# Altium PCB analog_osc.PcbDoc (part 2 of 2)
Units mm, origin at the board's own origin, x right, y up, seen from the top; angles counter-clockwise.
Board outline 145 x 85 mm, 4 copper layers (Top Layer, GND, Mid-Layer 1, Bottom Layer); 292 components, 196 nets, 993 pads, 506 vias.
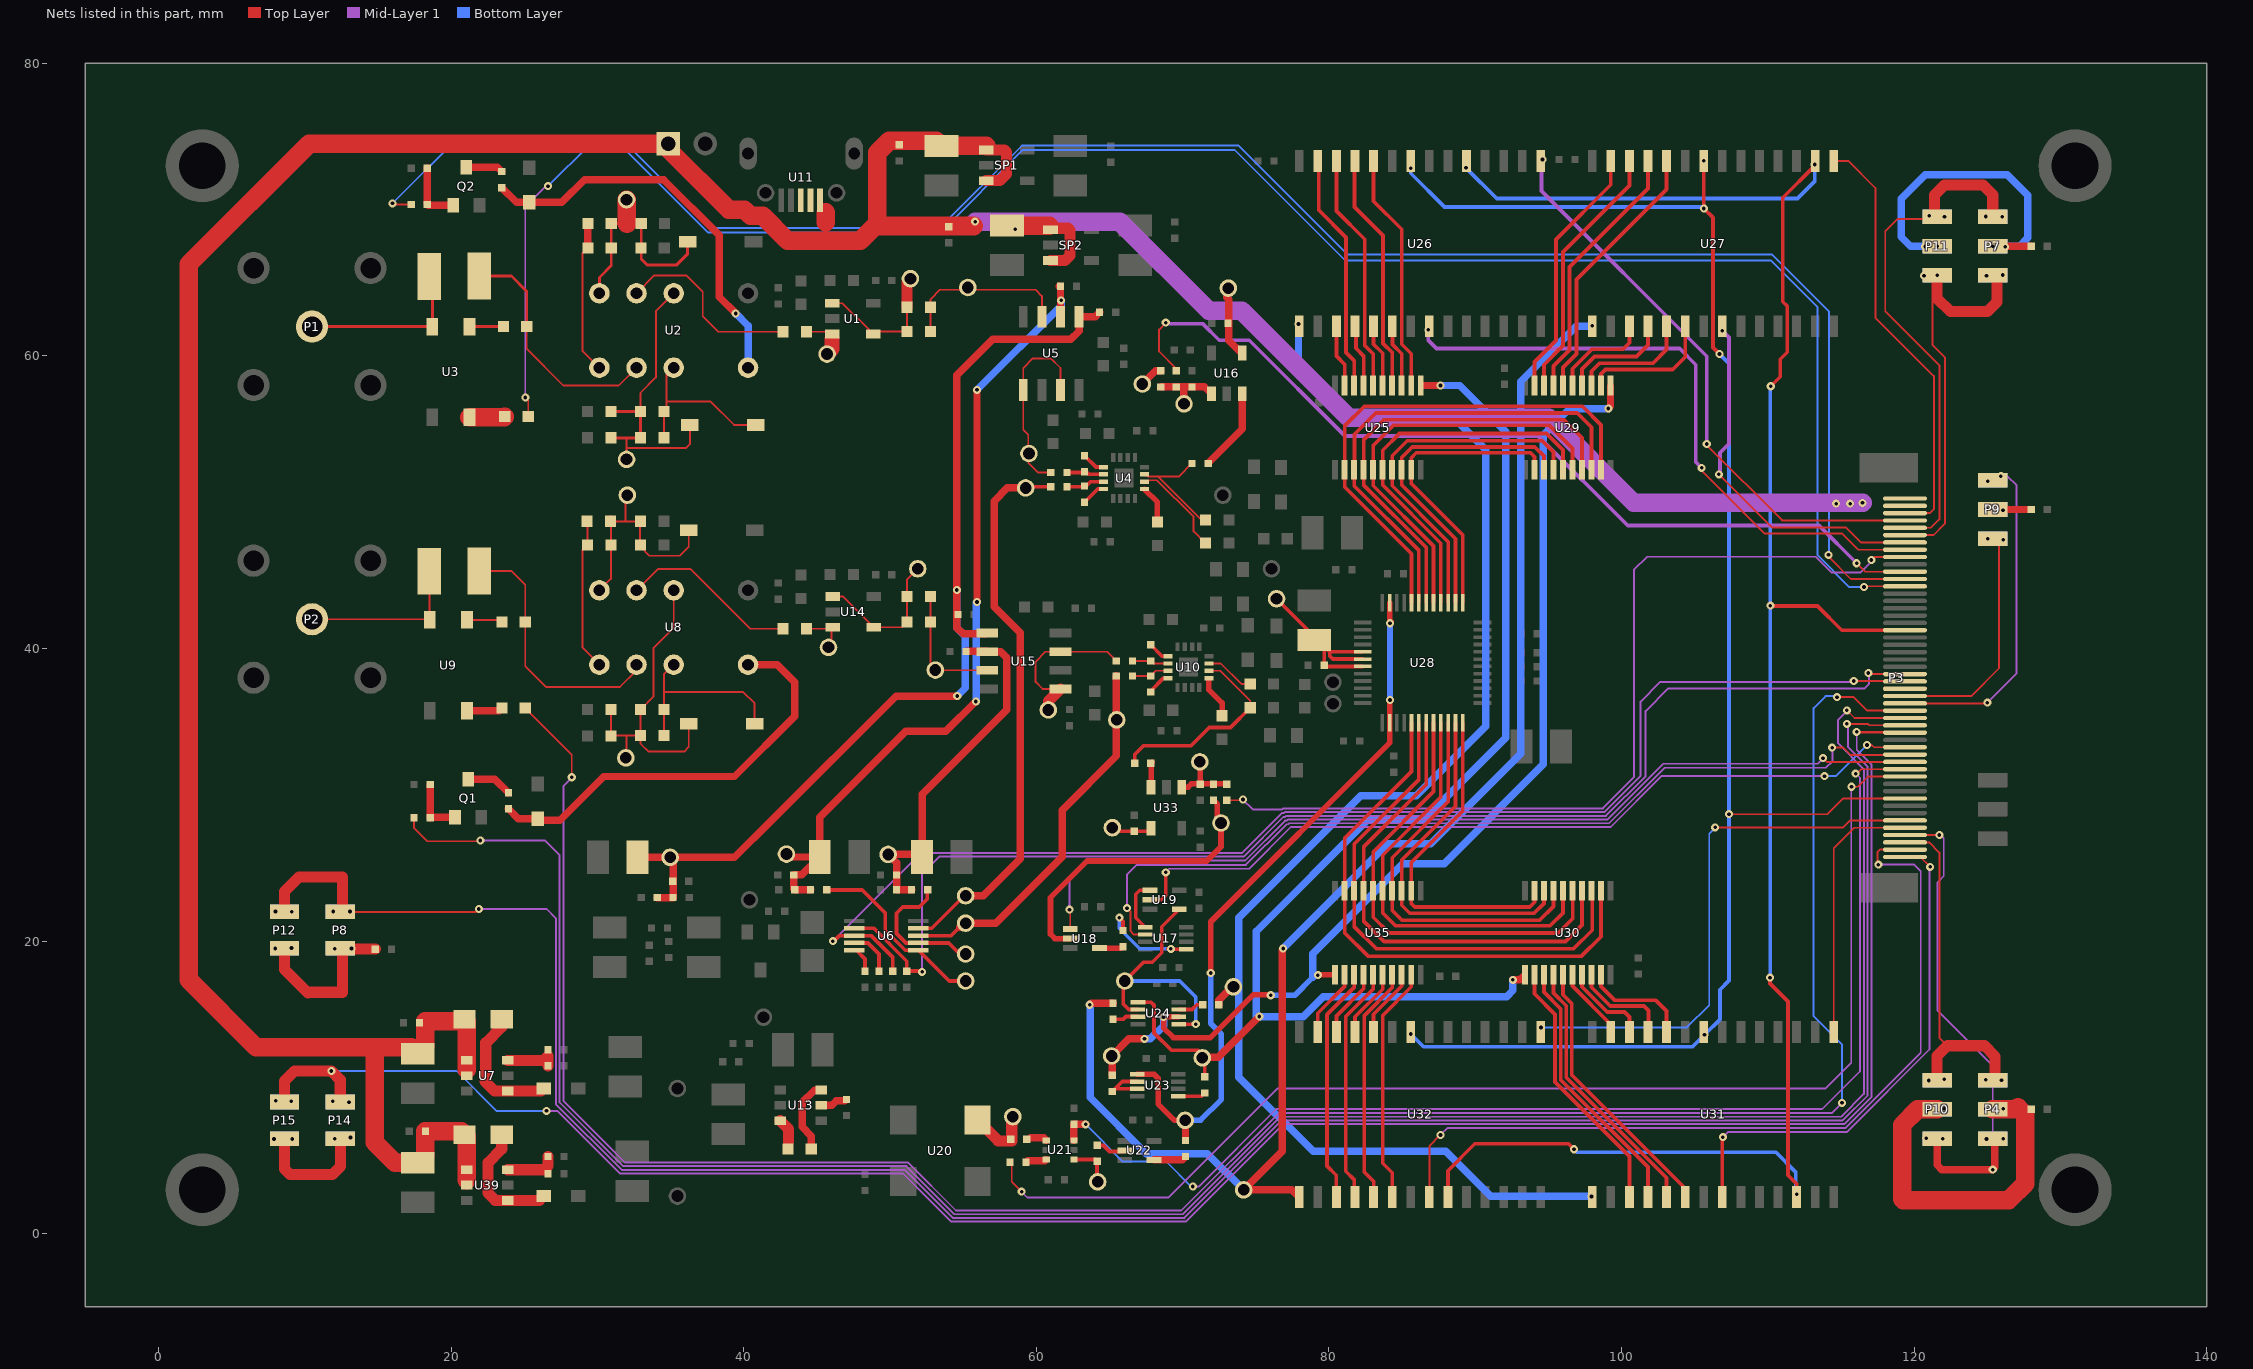
[diagram p4: the nets of this part, all layers, seen from the top]

## Via types
v1: diameter 0.55, hole 0.25, Top Layer to Bottom Layer, tented both sides, 501 vias
v2: diameter 0.55, hole 0.25, Top Layer to Bottom Layer, 5 vias

## Nets (pads, with @x,y where several pads share a name; then routed paths per layer and width w, separated by ;. In a path a pad name is that pad's centre, name@x,y a point inside that pad or via, vN(x,y) a via of type N, cw(c..) or ccw(c..) an arc to the next point about the centre after c; other vN are vias at no path point) (continued)
DQA8: P3.32 U26.19 U27.16 U31.12 U32.9 | length 137.7
  Top Layer w0.254: U32.9@88.135,2.5 88.135,4.31 89.975,6.15 96.375,6.15 v1(96.75,5.775) ; v1(110.15,17.5) 110.15,17.1 111.375,15.875 111.375,4 111.975,3.4 v1(111.975,2.7) ; v1(110.175,42.925) 110.15,42.95 110.125,42.95 110.175,42.9 113.4,42.9 115.05,41.25 P3.32@119.375,41.25 ; v1(110.2,57.925) 110.85,58.575 110.85,59.775 111.325,60.25 111.325,63.4 111.025,63.7 111.025,70.8 113.2,72.975 v1(113.2,73.075)
  Bottom Layer w0.254: v1(89.375,72.85) 91.475,70.75 112.025,70.75 113.2,71.925 v1(113.2,73.075) ; v1(96.75,5.775) 96.95,5.575 110.55,5.575 111.9,4.225 111.9,2.825 111.975,2.75 v1(111.975,2.7) ; v1(110.15,17.5) 110.175,17.525 v1(110.175,42.925) 110.175,57.9 v1(110.2,57.925)
NetC2_1: C2.1 C3.2 R2.1 U2.7 | length 12
  Top Layer w0.127: R2.1@34.55,54.4 C2.1@34.55,56.2 34.725,56.375 34.725,56.87 ; U2.7@35.22,59.195 34.725,58.7 34.725,56.87 ; C3.2@40.825,55.275 39.35,55.275 37.755,56.87 34.725,56.87
  Top Layer w0.2: U2.7@35.22,59.195 U2.7@35.43,59.195
NetC2_2: C2.2 C3.1 C6.1 R2.2 R3.1 T6.1 U2.2 | length 22.1
  Top Layer w0.127: T6.1@32,52.925 32,53.7 ; 32,54.375 32,53.7 ; C2.2@32.95,56.2 32.95,57.475 34,58.525 34,63.055 U2.2@35.22,64.275 ; C3.1@36.325,55.275 36.325,53.975 36.05,53.7 32,53.7
  Top Layer w0.2: R3.1@30.925,54.4 R2.2@32.95,54.4 C2.2@32.95,56.2 C6.1@30.925,56.2
NetC5_1: C5.1 P1.1 U3.4 | length 11.7
  Top Layer w0.2: P1.1@10.5,62 U3.4@18.725,62 18.725,65.225 C5.1@18.525,65.425
NetC5_2: C5.2 R37.2 U2.6 | length 16.7
  Top Layer w0.127: R37.2@25.175,62 25.175,60.475 27.675,57.975 31.46,57.975 U2.6@32.68,59.195
  Top Layer w0.2: C5.2@21.925,65.45 24.125,65.45 25.175,64.4 R37.2@25.175,62
NetC7_1: C7.1 C12.2 C16.2 R1.2 R9.1 T5.1 U2.4 | length 15.7
  Top Layer w0.2: U2.4@30.14,64.275 30.14,65.365 30.95,66.175 R1.2@30.95,67.375 C16.2@30.95,69.05 32.025,69.05 C7.1@33,69.05 33,66.625 33.425,66.2 35.4,66.2 36.175,66.975 C12.2@36.175,67.8
  Top Layer w1.27: T5.1@32,70.675 32,69.075 32.025,69.05
NetC16_1: C16.1 R1.1 U2.5 | length 10.5
  Top Layer w0.127: R1.1@29.35,67.375 28.975,67 28.975,60.36 U2.5@30.14,59.195
  Top Layer w0.508: R1.1@29.35,67.375 C16.1@29.35,69.05
NetC17_1: C17.1 R4.1 T2.1 U1.1 U1.4 | length 9.6
  Top Layer w0.127: U1.1@46.05,63.6 46.75,63.6 48.675,61.675 R4.1@51.175,61.675 C17.1@51.175,63.325
  Top Layer w0.762: C17.1@51.175,63.325 51.175,65.05 T2.1@51.4,65.275
NetC17_2: C17.2 R4.2 T3.1 U5.3 | length 11.7
  Top Layer w0.127: R4.2@52.775,61.675 C17.2@52.775,63.325 52.775,63.875 53.416,64.516 59.959,64.516 60.385,64.09 U5.3@60.385,62.675
NetC23_1: C23.1 P2.1 U9.4 | length 11.3
  Top Layer w0.127: P2.1@10.5,42 18.5,42 18.525,42.025 C23.1@18.525,45.275
NetC23_2: C23.2 R15.2 U8.6 | length 18.2
  Top Layer w0.127: C23.2@21.925,45.3 24.125,45.3 25.075,44.35 R15.2@25.075,41.8 25.075,38.775 26.475,37.375 31.55,37.375 32.68,38.505 U8.6@32.68,38.895
NetC24_1: C24.1 C26.2 R18.1 U8.7 | length 13
  Top Layer w0.127: R18.1@34.55,34.05 C24.1@34.55,35.825 34.55,37.025 ; U8.7@35.22,38.895 34.55,38.225 34.55,37.025 ; C26.2@40.75,34.85 40.75,36.25 39.975,37.025 34.55,37.025
NetC24_2: C24.2 C26.1 C39.1 R18.2 R23.1 T8.1 U8.2 | length 21.9
  Top Layer w0.127: C39.1@30.925,35.825 30.925,34.15 31.025,34.05 31.988,34.05 ; T8.1@31.85,32.625 31.988,32.762 31.988,34.05 ; U8.2@35.22,43.975 35.22,41.42 33.85,40.05 33.85,36.725 C24.2@32.95,35.825 R18.2@32.95,34.05 ; C26.1@36.25,34.85 36.25,33.275 35.925,32.95 33.5,32.95 32.95,33.5 R18.2@32.95,34.05 ; 31.988,34.05 R18.2@32.95,34.05
NetC27_1: C27.1 R20.1 U8.5 | length 10.4
  Top Layer w0.127: C27.1@29.325,48.675 R20.1@29.325,47.075 28.975,46.725 28.975,40.1 30.14,38.935 U8.5@30.14,38.895
NetC27_2: C27.2 C40.2 C41.1 R20.2 R27.1 T9.1 U8.4 | length 15.5
  Top Layer w0.127: U8.4@30.14,43.975 30.925,44.76 30.925,45.725 R20.2@30.925,47.075 30.925,48.675 31.925,48.675 ; T9.1@31.925,50.35 31.925,48.675 ; R27.1@32.925,47.1 32.925,48.675 31.925,48.675 ; R27.1@32.95,47.075 32.95,46.95 33.562,46.338 35.638,46.338 36.25,46.95 C40.2@36.25,48.075
  Top Layer w0.762: C27.2@30.9,48.7 C27.2@30.925,48.675 ; T9.1@31.95,50.375 T9.1@32.05,50.475
NetC42_1: C42.1 R24.1 T11.1 U14.1 U14.4 | length 10
  Top Layer w0.127: U14.1@46.1,43.55 46.8,43.55 U14.4@48.9,41.45 50.825,41.45 R24.1@51.175,41.8 C42.1@51.175,43.55 51.175,44.725 T11.1@51.9,45.45
NetC42_2: C42.2 R24.2 T12.1 U15.3 | length 8.8
  Top Layer w0.127: C42.2@52.775,43.55 R24.2@52.775,41.8 52.775,38.65 52.915,38.51 U15.3@56.65,38.51
NetC51_1: C51.1 U13.6 | length 5.1
  Top Layer w0.508: C51.1@44.625,5.8 44.625,6.675 44,7.3 44,8.975 44.85,9.825 U13.6@45.3,9.825
NetC51_2: C51.2 U13.3 | length 1.7
  Top Layer w0.762: U13.3@42.5,7.725 43.075,7.15 43.075,6.275
NetC85_1: C85.1 C107.1 T43.1 U28.5 U28.6 U28.7 | length 14
  Top Layer w0.254: T43.1@76.425,43.4 79.275,40.55 C85.1@79.675,40.15 ; U28.7@82.3,38.775 79.75,38.775 C107.1@79.675,38.85 C85.1@79.675,40.15 ; U28.6@82.3,39.275 80.275,39.275 80.062,39.488 80.062,39.763 80.05,39.775 ; U28.5@82.3,39.775 80.05,39.775 ; C85.1@79.675,40.15 80.05,39.775
NetD1_1: D1.1 L1.2 U7.1 | length 9.1
  Top Layer w0.762: L1.2@23.465,14.65 23.465,14.14 22.375,13.05 22.375,10.45 22.325,10.4 22.975,9.75 U7.1@23.875,9.75 26.15,9.75 D1.1@26.325,9.925
NetD5_1: D5.1 L2.2 U39.1 | length 8.5
  Top Layer w0.762: L2.2@23.465,6.775 23.465,5.79 22.525,4.85 22.525,2.775 23.025,2.275 U39.1@23.875,2.275 26.025,2.275 D5.1@26.325,2.575
NetP3_1: P3.1 U31.8 | length 35.2
  Top Layer w0.127: P3.1@119.375,25.75 120.425,25.75 v1(121.1,25.075)
  Top Layer w0.254: U31.8@106.89,2.5 106.89,6.565 v1(106.925,6.6)
  Mid-Layer 1 w0.127: v1(106.925,6.6) 107.275,6.95 115.4,6.95 121.05,12.6 121.05,25.025 v1(121.1,25.075)
NetP3_2: P3.2 U32.8 | length 58
  Top Layer w0.127: U32.8@86.865,2.5 86.865,5.99 v1(87.625,6.75) ; v1(117.55,25.225) 117.5,25.275 117.5,26.1 117.65,26.25 P3.2@119.375,26.25
  Mid-Layer 1 w0.127: v1(87.625,6.75) 88.109,7.234 115.325,7.234 120.45,12.359 120.45,24.775 120,25.225 v1(117.55,25.225)
NetP3_3: P3.3 P4.1 P10.1 | length 23.9
  Top Layer w0.127: P3.3@119.375,26.75 121.025,26.75 121.725,26.05 121.725,13.4 122.275,12.85
  Top Layer w0.762: P10.1@121.575,10.5 121.575,12.15 122.275,12.85 124.8,12.85 125.525,12.125 125.525,10.65 P4.1@125.375,10.5
  other v1: 121,10.475 125.975,10.5 124.9,10.525 122.05,10.55
NetP3_4: P3.4 P4.3 P10.3 | length 35.2
  Top Layer w0.127: P3.4@119.375,27.25 v1(121.725,27.25)
  Top Layer w0.508: P10.3@121.575,6.5 121.575,4.7 121.9,4.375 v1(125.375,4.375) 125.525,4.525 125.525,6.35 P4.3@125.375,6.5
  Mid-Layer 1 w0.127: v1(121.725,27.25) 121.725,27.275 121.75,27.3 122.025,27.025 122.025,24.45 121.6,24.025 121.6,15.25 125.375,11.475 v1(125.375,4.375)
  other v1: 124.95,6.475 121.95,6.5 126.1,6.5 120.825,6.525
NetP3_5: P3.5 U31.15 | length 18
  Top Layer w0.127: U31.15@114.51,13.8 114.51,26.36 115.9,27.75 P3.5@119.375,27.75
NetP3_6: P3.6 U32.15 | length 37.9
  Top Layer w0.127: U32.15@94.485,13.8 94.485,14.085 v1(94.5,14.1) ; v1(106.4,27.775) 115.15,27.775 115.625,28.25 P3.6@119.375,28.25
  Bottom Layer w0.127: v1(94.5,14.1) 104.475,14.1 106,15.625 106,27.35 106.4,27.75 v1(106.4,27.775)
NetP3_9: P3.9 U26.22 U27.22 U31.22 U32.22 | length 115.9
  Top Layer w0.127: v1(107.35,28.675) 114.075,28.675 115.15,29.75 P3.9@119.375,29.75
  Top Layer w0.254: U27.22@105.75,73.195 v1(105.62,73.325) 105.62,70.08 v1(105.625,70.075) 106.25,69.45 106.25,60.575 v1(106.7,60.125)
  Bottom Layer w0.254: v1(85.595,13.655) 86.475,12.775 104.85,12.775 v1(105.675,13.6) 106.725,14.65 106.725,16.675 107.35,17.3 v1(107.35,28.675) 107.35,59.475 v1(106.7,60.125) ; v1(85.6,72.825) 85.6,72.475 87.9,70.175 v1@105.625,70.175
NetP3_12: P3.12 R381.2 | length 85.9
  Top Layer w0.127: R381.2@58.325,4.975 58.325,3.55 v1(59,2.875) ; v1(115.725,30.55) 116.15,30.55 116.85,31.25 P3.12@119.375,31.25
  Mid-Layer 1 w0.127: v1(59,2.875) 59.4,2.475 69.025,2.475 76.475,9.925 113.925,9.925 115.7,11.7 115.7,30.525 v1(115.725,30.55)
NetP3_13: P3.13 R62.1 U21.6 | length 83.8
  Top Layer w0.127: v1@116.037,31.413 116.375,31.75 P3.13@119.375,31.75
  Top Layer w0.508: U21.6@62.575,6.375 R62.1@62.575,7.475 v1(63.375,7.475)
  Mid-Layer 1 w0.127: v1(70.7,3.225) 71.1,3.225 76.4,8.525 113.725,8.525 116.3,11.1 116.3,31.15 v1(116,31.45)
  Bottom Layer w0.127: v1(63.375,7.475) 65.925,4.925 68.9,4.925 70.6,3.225 v1(70.7,3.225)
NetP3_14: P3.14 U18.1 | length 64
  Top Layer w0.127: v1(62.275,22.15) 62.325,22.1 U18.1@62.325,20.825 ; v1(113.775,32.5) 114.025,32.25 P3.14@119.375,32.25
  Mid-Layer 1 w0.127: v1(62.275,22.15) 62.275,24.158 63.618,25.5 74.266,25.5 77.004,28.238 77.12,28.238 77.19,28.308 99.04,28.308 102.857,32.125 113.4,32.125 v1(113.775,32.5)
NetP3_15: P3.15 U17.6 | length 62.6
  Top Layer w0.127: v1(66.2,22.25) 66.45,22 66.45,20.675 66.675,20.45 U17.6@67.45,20.45 ; v1(114.4,33.225) 115.15,33.225 115.65,32.725 119.35,32.725 P3.15@119.375,32.75
  Mid-Layer 1 w0.127: v1(66.2,22.25) 66.2,24.55 66.854,25.204 74.329,25.204 77.109,27.984 77.225,27.984 77.295,28.054 99.145,28.054 102.941,31.85 113.975,31.85 114.425,32.3 114.425,33.225 v1(114.4,33.225)
NetP3_16: P3.16 U19.2 | length 57
  Top Layer w0.127: v1(116.775,33.4) 117.107,33.4 117.257,33.25 P3.16@119.375,33.25
  Top Layer w0.254: U19.2@67.775,22.825 68.55,22.825 68.85,23.125 v1(68.85,24.7)
  Mid-Layer 1 w0.127: v1(68.85,24.7) 69.1,24.95 74.55,24.95 77.4,27.8 99.25,27.8 102.725,31.275 v1(113.875,31.275)
  Bottom Layer w0.127: v1(113.875,31.275) 114.65,31.275 v1(116.775,33.4)
NetP3_18: P3.18 P14.1 P15.1 | length 152.4
  Top Layer w0.127: v1(116.075,34.3) 119.325,34.3 P3.18@119.375,34.25 116.125,34.25 v1(116.075,34.3)
  Top Layer w0.762: P15.1@8.625,9 8.625,10.45 9.3,11.125 v1(11.825,11.125) 12.425,10.525 P14.1@12.425,9
  Mid-Layer 1 w0.127: v1(26.525,8.4) 27.272,8.4 31.559,4.113 50.909,4.113 54.197,0.825 70.228,0.825 76.891,7.488 115.22,7.488 117.075,9.343 117.075,32.075 116.075,33.075 v1(116.075,34.3)
  Bottom Layer w0.127: v1(11.825,11.125) 20.375,11.125 23.1,8.4 v1(26.525,8.4)
  other v1: 13.025,8.975 9.075,9.05 11.925,9.05 8.025,9.1
NetP3_19: P3.19 P8.1 P12.1 | length 162.3
  Top Layer w0.127: P8.1@12.425,22 21.7,22 v1(21.9,22.2) ; v1(115.4,34.85) 116.825,34.85 116.925,34.75 P3.19@119.375,34.75
  Top Layer w0.762: P12.1@8.625,22 8.625,23.4 9.6,24.375 12.575,24.375 12.575,22.15 P8.1@12.425,22
  Mid-Layer 1 w0.127: v1(21.9,22.2) 26.525,22.2 27.167,21.558 27.167,8.865 31.665,4.367 51.015,4.367 54.303,1.079 70.122,1.079 76.785,7.742 115.114,7.742 116.821,9.449 116.821,31.929 115.475,33.275 115.475,34.775 v1(115.4,34.85)
  other v1: 9.125,22 8,22.025 11.95,22.025 13.1,22.025
NetP3_20: P3.20 R35.2 | length 155.5
  Top Layer w0.127: R35.2@17.475,28.425 17.475,27.725 18.375,26.825 21.95,26.825 v1(22,26.875) ; v1(115.4,35.775) 115.925,35.25 P3.20@119.375,35.25
  Mid-Layer 1 w0.127: v1(22,26.875) 26.425,26.875 27.421,25.879 27.421,8.97 31.77,4.621 51.12,4.621 54.408,1.333 70.017,1.333 76.68,7.996 115.009,7.996 116.567,9.554 116.567,31.754 114.8,33.521 114.8,35.125 115.4,35.725 v1(115.4,35.775)
NetP3_21: P3.21 R26.1 | length 156.8
  Top Layer w0.127: R26.1@25.075,35.925 28.25,32.75 v1(28.25,31.2) ; v1(114.725,36.675) 115.875,36.675 116.8,35.75 P3.21@119.375,35.75
  Mid-Layer 1 w0.127: v1(28.25,31.2) 28.25,31.158 27.675,30.583 27.675,9.075 31.875,4.875 51.225,4.875 54.513,1.587 69.912,1.587 76.575,8.25 114.375,8.25 v1(115.075,8.95)
  Bottom Layer w0.127: v1(114.725,36.675) 114.725,36.75 113.95,36.75 113.125,35.925 113.125,14.875 115.075,12.925 v1(115.075,8.95)
NetP3_22: P3.22 P9.1 | length 22.7
  Top Layer w0.127: P3.22@119.375,36.25 125.025,36.25 125,36.275 v1(125,36.3)
  Mid-Layer 1 w0.127: v1(125,36.3) 127,38.3 127,51.15 126.375,51.775 v1(125.925,51.775)
  other v1: 125.025,51.425
NetP3_23: P3.23 P9.3 | length 16.2
  Top Layer w0.127: P3.23@119.375,36.75 123.9,36.75 125.8,38.65 125.8,47.075 P9.3@125.375,47.5
  other v1: 126.1,47.425 125.025,47.5
NetP3_24: P3.24
NetP3_25: P3.25 R40.2 U6.3 | length 89.6
  Top Layer w0.127: v1(115.875,37.775) 119.35,37.775 P3.25@119.375,37.75
  Top Layer w0.254: v1(46.1,20) 46.175,20 46.55,20.375 U6.3@47.55,20.375 48.7,20.375 50.2,18.875 R40.2@50.2,17.95
  Mid-Layer 1 w0.127: v1(46.1,20) 52.125,26.025 74.072,26.025 76.793,28.746 76.909,28.746 76.979,28.816 98.829,28.816 101.3,31.287 101.3,36.375 102.625,37.7 115.775,37.7 115.925,37.85 115.925,37.825 v1(115.875,37.775)
NetP3_26: P3.26 R48.1 U6.2 | length 89
  Top Layer w0.127: v1(116.875,38.325) 116.95,38.25 P3.26@119.375,38.25
  Top Layer w0.254: U6.2@47.55,20.875 48.9,20.875 51.15,18.625 R48.1@51.15,17.95 52.15,17.95 v1(52.2,17.9)
  Mid-Layer 1 w0.127: v1(52.2,17.9) 52.2,24.6 53.371,25.771 74.178,25.771 76.899,28.492 77.014,28.492 77.084,28.562 98.934,28.562 101.65,31.278 101.65,35.725 103.2,37.275 116.625,37.275 116.925,37.575 116.925,38.275 v1(116.875,38.325)
NetP3_38: P3.38 R6.1 | length 137.7
  Top Layer w0.127: v1(25.075,57.15) 25.275,56.95 R6.1@25.275,55.85 ; v1(116.575,44.2) 116.625,44.25 P3.38@119.375,44.25
  Mid-Layer 1 w0.127: v1(25.075,57.15) 25.075,70.2 26.55,71.675 v1(26.625,71.6)
  Bottom Layer w0.127: v1(26.625,71.6) 29.5,74.475 31.525,74.475 37.575,68.425 53.434,68.425 59.084,74.075 73.55,74.075 81.1,66.525 110.2,66.525 113.4,63.325 113.4,46.375 115.575,44.2 v1(116.575,44.2)
NetP3_39: P3.39 R54.2 | length 133.5
  Top Layer w0.127: v1(16,70.425) 16.025,70.425 16.1,70.35 R54.2@17.275,70.35 ; v1(114.15,46.4) 114.15,46.275 115.675,44.75 P3.39@119.375,44.75
  Bottom Layer w0.127: v1(16,70.425) 20.425,74.85 31.65,74.85 37.75,68.75 53.4,68.75 59.025,74.375 73.825,74.375 81.275,66.925 110.3,66.925 114.175,63.05 v1@114.175,46.4
NetP3_40: P3.40 R55.2 | length 61.6
  Top Layer w0.127: v1(68.85,62.275) 68.85,62.25 68.4,61.8 68.4,60.3 69.575,59.125 R55.2@69.575,58.975 ; v1(116.075,45.825) 116.65,45.25 P3.40@119.375,45.25
  Mid-Layer 1 w0.254: v1(68.85,62.275) 68.939,62.186 71.389,62.186 72.5,61.075 74.55,61.075 81.1,54.525 94.3,54.525 100.425,48.4 113.5,48.4 v1(116.075,45.825)
NetP3_42: P3.42 R79.2 | length 63.1
  Top Layer w0.127: R79.2@73.025,29.625 74.075,29.625 v1(74.125,29.675) ; v1(117.075,46.05) 117.275,46.25 P3.42@119.375,46.25
  Mid-Layer 1 w0.127: v1(74.125,29.675) 74.8,29 76.804,29 76.874,29.07 98.724,29.07 100.85,31.196 100.85,45.375 101.75,46.275 113.275,46.275 114.35,45.2 116.35,45.2 117.075,45.925 v1(117.075,46.05)
NetP3_43: P3.43 U26.8 | length 43.2
  Top Layer w0.127: v1(105.475,52.35) 105.525,52.3 105.525,52.1 109.775,47.85 115.075,47.85 116.175,46.75 P3.43@119.375,46.75
  Mid-Layer 1 w0.254: v1(86.8,61.775) 86.8,61.05 87.35,60.5 103.975,60.5 105.075,59.4 105.075,52.75 v1(105.475,52.35)
NetP3_44: P3.44 U27.8 | length 25
  Top Layer w0.127: v1(106.65,51.9) 110.275,48.275 115.325,48.275 116.35,47.25 P3.44@119.375,47.25
  Mid-Layer 1 w0.254: v1@106.725,51.825 106.725,53.375 107.35,54 107.35,61.25 v1(106.875,61.725)
NetP3_45: P3.45 P7.3 P11.3 | length 28.8
  Top Layer w0.127: P3.45@119.375,47.75 121.325,47.75 122.1,48.525 122.1,59.9 121.25,60.75 121.25,65.175 v1(121.575,65.5)
  Top Layer w0.762: v1(121.575,65.5) 121.575,63.925 122.475,63.025 125.025,63.025 125.675,63.675 125.675,65.2 P7.3@125.375,65.5
  other v1: 120.675,65.475 124.95,65.475 126.05,65.525
NetP3_46: P3.46 P7.1 P11.1 | length 34.7
  Top Layer w0.127: P3.46@119.375,48.25 121.15,48.25 121.725,48.825 121.725,59.35 118.025,63.05 118.025,68.525 118.85,69.35 P11.1@120.975,69.35
  Top Layer w0.762: P11.1@121.575,69.5 121.4,69.675 121.4,71 122.075,71.675 124.7,71.675 125.375,71 P7.1@125.375,69.5
  other v1: 122.075,69.5 126.025,69.5 124.9,69.525 121.025,69.575
NetP3_47: P3.47 U26.15 | length 39.9
  Top Layer w0.127: v1(105.825,53.975) 105.825,53.9 110.975,48.75 P3.47@119.375,48.75
  Mid-Layer 1 w0.254: v1(94.6,73.425) 94.525,73.35 94.525,71.275 105.825,59.975 v1(105.825,53.975)
NetP3_48: P3.48 U27.15 | length 29.3
  Top Layer w0.127: U27.15@114.51,73.325 115.5,73.325 117.35,71.475 117.35,62.616 121.35,58.616 121.35,49.525 121.075,49.25 P3.48@119.375,49.25
NetP4_2: P4.2 P10.2 R16.2 | length 24
  Top Layer w1.27: P10.2@121.575,8.5 120.25,8.5 119.175,7.425 119.175,2.375 119.25,2.3 126.475,2.3 127.6,3.425 127.6,8.125 127.1,8.625 126.975,8.5 P4.2@125.375,8.5
  other v1: 120.9,8.45 122.05,8.55 124.9,8.55 126.1,8.55
NetP7_2: P7.2 P11.2 R67.2 | length 23.4
  Top Layer w0.508: v1(125.375,67.5) R67.2@128,67.5
  Bottom Layer w0.508: v1(121.575,67.5) 119.75,67.5 119.125,68.125 119.125,70.75 120.75,72.375 126.375,72.375 127.775,70.975 127.775,68.075 127.2,67.5 v1(125.375,67.5)
  other v1: 126.225,67.45 120.75,67.475
NetP8_2: P8.2 P12.2 R68.2 | length 11.5
  Top Layer w0.762: P12.2@8.625,19.5 8.625,18.05 10.225,16.45 10.275,16.5 12.575,16.5 12.575,19.35 P8.2@12.475,19.45 ; P8.2@12.425,19.5 P8.2@12.475,19.45 ; R68.2@14.825,19.45 P8.2@12.475,19.45
  other v1: 12.05,19.475 7.975,19.5 13.2,19.5 9.1,19.525
NetP9_2: P9.2 R19.2 | length 2.6
  Top Layer w0.508: P9.2@125.375,49.5 R19.2@128,49.5
  other v1: 126.075,49.45 124.95,49.55
NetP14_2: P14.2 P15.2 | length 8.2
  Top Layer w0.762: P15.2@8.625,6.5 8.625,4.425 9,4.05 11.9,4.05 12.45,4.6 12.45,6.475 P14.2@12.425,6.5
  other v1: 7.9,6.475 9.15,6.475 12.05,6.5 13.125,6.575
NetQ1_1: Q1.1 R34.1 R35.1 | length 4
  Top Layer w0.508: R34.1@18.575,30.7 R35.1@18.575,28.425 18.625,28.475 Q1.1@20.275,28.475
NetQ1_3: Q1.3 R33.1 | length 3.1
  Top Layer w0.508: Q1.3@21.175,31.075 23,31.075 R33.1@23.925,30.15
NetQ2_1: Q2.1 R53.1 R54.1 | length 4.3
  Top Layer w0.508: R53.1@18.375,72.825 R54.1@18.375,70.35 18.425,70.3 Q2.1@20.15,70.3
NetQ2_3: Q2.3 R51.1 | length 2.5
  Top Layer w0.508: Q2.3@21.05,72.9 23.175,72.9 R51.1@23.475,72.6
NetR5_1: R5.1 R7.2 U4.2 | length 2.6
  Top Layer w0.254: R7.2@62.1,52.025 63.25,52.025 R5.1@63.3,52.075 63.425,52.075 63.6,51.9 U4.2@64.6,51.9
NetR5_2: R5.2 U4.1 | length 1.6
  Top Layer w0.254: R5.2@63.3,53.175 64.075,52.4 U4.1@64.6,52.4
NetR6_2: R6.2 U3.2 | length 2.4
  Top Layer w1.27: U3.2@21.265,55.8 23.625,55.8 R6.2@23.675,55.85
NetR7_1: R7.1 T1.1 U5.5 U5.7 | length 13
  Top Layer w0.127: R7.1@61,52.025 60.125,52.025 59.45,52.7 59.45,54.615 59.115,54.95 U5.5@59.115,57.675 59.115,59.165 59.775,59.825 61,59.825 61.655,59.17 U5.7@61.655,58
  Top Layer w0.508: U5.7@61.655,57.675 U5.7@61.655,58
NetR10_2: R10.2 U4.9 | length 2.6
  Top Layer w0.381: U4.9@67.4,50.875 68.275,50 R10.2@68.275,48.65
NetR11_2: R11.2 R12.1 U4.3 | length 2.6
  Top Layer w0.254: R11.2@62.1,51.05 63.25,51.05 R12.1@63.3,51.1 63.4,51.1 63.7,51.4 U4.3@64.6,51.4
NetR12_2: R12.2 U4.4 | length 1.7
  Top Layer w0.254: R12.2@63.3,50 64.2,50.9 U4.4@64.6,50.9
NetR13_1: R13.1 R14.2 U39.3 | length 3.5
  Top Layer w0.762: U39.3@23.875,4.375 26.35,4.375 26.625,4.65 R14.2@26.625,5.275
NetR15_1: R15.1 U9.3 | length 2.2
  Top Layer w0.127: U9.3@21.09,41.95 R15.1@23.325,41.95
NetR17_1: R17.1 R80.2 U7.3 | length 3.5
  Top Layer w0.762: U7.3@23.875,11.85 26.325,11.85 26.625,12.15 R17.1@26.625,11.475
NetR21_1: R21.1 U2.3 | length 13.1
  Top Layer w0.127: U2.3@32.68,64.275 33.905,65.5 36.075,65.5 37.2,64.375 37.2,62.7 38.25,61.65 R21.1@42.7,61.65
NetR21_2: R21.2 T4.1 U1.3 | length 3.1
  Top Layer w0.127: R21.2@44.3,61.65 45.9,61.65 U1.3@45.9,61.3
  Top Layer w1.016: T4.1@45.7,60.125 46.05,60.475 46.05,61.15
NetR22_1: R22.1 R25.2 U10.2 | length 2.5
  Top Layer w0.127: R25.2@66.575,39.15 R22.1@67.825,39.15 ; R22.1@67.825,39.15 68,38.975 U10.2@69,38.975
NetR22_2: R22.2 U10.1 | length 1.5
  Top Layer w0.254: R22.2@67.825,40.25 68.6,39.475 U10.1@69,39.475
NetR25_1: R25.1 T13.1 U15.5 U15.7 | length 11.1
  Top Layer w0.127: U15.5@61.65,37.24 60.425,37.24 59.95,37.715 59.95,39.105 60.625,39.78 U15.7@61.65,39.78 64.845,39.78 R25.1@65.475,39.15
  Top Layer w0.762: T13.1@60.825,35.8 60.825,36.415 U15.5@61.65,37.24
NetR26_2: R26.2 U9.2 | length 2.5
  Top Layer w0.508: U9.2@21.09,35.75 23.3,35.75 R26.2@23.475,35.925
NetR28_1: R28.1 U8.3 | length 12.3
  Top Layer w0.127: U8.3@32.68,43.975 34.13,45.425 36.375,45.425 40.45,41.35 R28.1@42.7,41.35
NetR28_2: R28.2 T10.1 U14.3 | length 3.1
  Top Layer w0.127: R28.2@44.3,41.35 46,41.35 46,40.275 T10.1@45.8,40.075
NetR29_2: R29.2 U10.9 | length 2.9
  Top Layer w0.381: U10.9@71.8,37.9 71.8,37.175 72.7,36.275 R29.2@72.7,35.4
NetR31_2: R31.2 R32.1 U10.3 | length 2.6
  Top Layer w0.127: R31.2@66.575,38.125 R32.1@67.825,38.125 ; R32.1@67.825,38.125 68.175,38.475 U10.3@69,38.475
NetR32_2: R32.2 U10.4 | length 1.6
  Top Layer w0.254: R32.2@67.825,37.025 67.825,37.1 68.7,37.975 U10.4@69,37.975
NetR36_2: R36.2 R77.1 R79.1 T17.1 U33.1 | length 4.7
  Top Layer w0.381: U33.1@69.95,30.525 70.375,30.525 70.6,30.75 R36.2@71.2,30.75 ; T17.1@71.175,32.25 71.2,32.225 R36.2@71.2,30.75 ; R36.2@71.2,30.725 R36.2@71.2,30.75 ; R79.1@73.025,30.725 73,30.75 R36.2@71.2,30.75
NetR37_1: R37.1 U3.3 | length 2.3
  Top Layer w0.2: U3.3@21.265,62 R37.1@23.575,62
NetR41_2: R41.2 U6.4 | length 3.2
  Top Layer w0.254: U6.4@47.55,19.875 48.5,19.875 49.25,19.125 R41.2@49.25,17.95
NetR42_2: R42.2 U6.5 | length 1.8
  Top Layer w0.254: U6.5@47.55,19.375 47.7,19.375 48.3,18.775 R42.2@48.3,17.95
NetR49_1: R49.1 U18.4 | length 1.6
  Top Layer w0.381: U18.4@64.325,19.525 65.825,19.525 R49.1@65.925,19.625
NetR49_2: R49.2 U17.1 | length 6.9
  Top Layer w0.254: v1(65.675,21.6) 65.925,21.35 R49.2@65.925,20.725 ; v1@69,19.475 69.025,19.45 U17.1@70.25,19.45
  Bottom Layer w0.254: v1(65.675,21.6) 65.675,20.875 67.075,19.475 v1@69,19.475
  other v1: 69.2,19.475
NetR50_1: R50.1 R55.1 R59.2 T38.1 U16.1 | length 4.8
  Top Layer w0.508: R50.1@68.5,57.875 R55.1@69.575,57.875 70.125,57.875 ; T38.1@70.075,56.725 70.075,57.825 70.125,57.875 ; U16.1@71.975,57.4 71.5,57.875 R59.2@70.65,57.875 70.125,57.875
NetR50_2: R50.2 T171.1 | length 1.6
  Top Layer w0.508: T171.1@67.25,58.075 68.15,58.975 R50.2@68.5,58.975
NetR52_1: R52.1 R71.2 U10.10 | length 14
  Top Layer w0.127: U10.10@71.8,38.475 72.575,38.475 74.625,36.425 R71.2@74.625,35.95
  Top Layer w0.254: R52.1@66.725,32.15 66.725,32.75 67.325,33.35 70.575,33.35 71.825,34.6 73.275,34.6 R71.2@74.625,35.95
NetR52_2: R52.2 U33.3 | length 1.7
  Top Layer w0.381: U33.3@67.85,30.525 67.85,32.15 R52.2@67.925,32.225
NetR56_1: R56.1 U22.2 | length 2.1
  Top Layer w0.254: R56.1@64.175,6.025 64.6,6.025 65,5.625 65.975,5.625 U22.2@66.05,5.7
NetR56_2: R56.2 T32.1 U21.4 | length 3
  Top Layer w0.254: U21.4@62.575,5.075 64.025,5.075 64.175,4.925 64.15,4.9 T32.1@64.15,3.625
NetR57_1: R57.1 T33.1 U23.1 U28.14 U28.47 | length 49.5
  Top Layer w0.381: U23.1@66.9,10.9 68.05,10.9 68.325,10.625 68.325,8.875 69.45,7.75 T33.1@70.175,7.75 T33.1@70.2,7.75 ; v1(71.925,17.825) 71.925,21.325 84.15,33.55 84.15,36.45 v1(84.175,36.475) ; U28.47@84.15,43.125 84.15,41.921 84.25,41.821 84.25,41.8 v1(84.175,41.725)
  Top Layer w0.508: R57.1@70.2,6.375 T33.1@70.2,7.75
  Bottom Layer w0.381: T33.1@70.175,7.75 70.187,7.762 71.238,7.762 72.65,9.175 72.65,13.65 71.925,14.375 v1(71.925,17.825) ; v1(84.175,36.475) v1(84.175,41.725)
NetR57_2: R57.2 U22.4 | length 2.2
  Top Layer w0.508: U22.4@68.05,5.05 69.975,5.05 R57.2@70.2,5.275
NetR58_1: R58.1 T34.1 U24.6 U29.11 U35.11 | length 73.6
  Top Layer w0.381: U24.6@69.75,14.825 68.725,14.825 v1(68.7,14.8) 68.7,14.075 69.375,13.4 71.9,13.4 74.825,16.325 76,16.325 v1(76.025,16.3) ; v1(79.25,17.675) 79.275,17.7 U35.11@80.425,17.7
  Top Layer w0.508: R58.1@65.2,10.825 65.2,12.1 T34.1@65.15,12.15 66.325,13.325 v1(67.4,13.325) ; v1(99.1,56.4) 99.25,56.55 U29.11@99.25,57.975
  Bottom Layer w0.381: v1(76.025,16.3) 77.675,16.3 78.887,17.512
  Bottom Layer w0.508: v1(67.4,13.325) 67.8,13.325 68.7,14.225 68.7,14.775 68.675,14.8 v1(68.7,14.8) ; 78.887,17.512 78.887,19.137 85.05,25.3 87.875,25.3 94.65,32.075 94.65,54.575 96.475,56.4 v1(99.1,56.4)
NetR58_2: R58.2 U23.2 U23.3 | length 3.5
  Top Layer w0.254: R58.2@65.2,9.725 R58.2@65.375,9.9 ; U23.3@66.9,9.9 R58.2@65.375,9.9 ; U23.2@66.9,10.4 65.875,10.4 R58.2@65.375,9.9
NetR60_1: R60.1 R70.2 U4.11 | length 8.2
  Top Layer w0.127: U4.11@67.4,51.9 67.475,51.825 67.591,51.825 67.666,51.75 68.35,51.75 ; R60.1@70.675,52.7 69.725,51.75 68.35,51.75 ; R70.2@71.575,48.775 71.325,48.775 68.35,51.75
NetR60_2: R60.2 U16.3 | length 5.7
  Top Layer w0.508: R60.2@71.775,52.7 74.075,55 U16.3@74.075,57.4
NetR61_2: R61.2 T39.1 U16.4 | length 4.3
  Top Layer w0.508: 73,64 73.15,63.85 73.15,61.05 74,60.2 U16.4@74.075,60.2
NetR69_2: R69.2 U4.10 | length 6.6
  Top Layer w0.127: U4.10@67.4,51.4 67.619,51.4 67.715,51.496 68.245,51.496 70.75,48.991 70.75,48 71.55,47.2 R69.2@71.575,47.2
NetR72_2: R72.2 U10.11 | length 3.4
  Top Layer w0.127: U10.11@71.8,38.975 72.614,38.975 74.014,37.575 R72.2@74.625,37.575
NetR73_1: R73.1 T35.1 U24.1 U25.11 U30.11 | length 89.5
  Top Layer w0.254: U24.1@66.95,15.825 67.85,15.825 68.05,15.625 68.05,13.725 69.225,12.55 71.025,12.55 71.525,12.05 R73.1@71.525,10.725
  Top Layer w0.508: T35.1@71.525,12.05 72.45,12.05 v1(75.25,14.85) ; 86.5,57.975 v1(87.625,57.975) ; v1(92.575,17.35) 93.05,17.35 U30.11@93.338,17.637
  Bottom Layer w0.508: v1(87.625,57.975) 88.95,57.975 92.1,54.825 92.1,33.9 86.45,28.25 82.625,28.25 75.05,20.675 75.05,14.825 78.25,14.825 79.625,16.2 92.15,16.2 92.575,16.625 v1(92.575,17.35)
NetR73_2: R73.2 U23.5 | length 1.9
  Top Layer w0.254: U23.5@69.7,9.4 71.3,9.4 R73.2@71.525,9.625
NetR74_1: R74.1 T36.1 U26.1 U31.1 | length 99.3
  Top Layer w0.508: R74.1@72.475,15.65 72.475,15.95 T36.1@73.3,16.775
  Bottom Layer w0.508: v1(77.925,62.175) 77.925,59.025 81.35,55.6 88.7,55.6 90.725,53.575 90.725,34.675 85.975,29.925 82.175,29.925 73.85,21.6 73.85,10.7 78.925,5.625 87.975,5.625 91.05,2.55 v1(97.95,2.55) v1@97.95,2.575
NetR74_2: R74.2 U24.7 | length 1.8
  Top Layer w0.254: U24.7@69.75,15.325 70.65,15.325 70.975,15.65 R74.2@71.375,15.65
NetR75_1: R75.1 U24.3 | length 1.8
  Top Layer w0.254: R75.1@65.25,14.65 65.925,14.65 66.125,14.85 66.925,14.85 U24.3@66.95,14.825
NetR75_2: R75.2 T37.1 U27.1 U32.1 | length 96.3
  Top Layer w0.508: v1(63.65,15.65) 63.75,15.75 R75.2@65.25,15.75 ; v1@76.8,19.425 76.8,5.625 T37.1@74.175,3 77.475,3 U32.1@77.975,2.5
  Bottom Layer w0.508: v1(63.65,15.65) 63.675,15.625 63.675,9.325 67.525,5.475 71.7,5.475 T37.1@74.175,3 ; v1(76.875,19.5) 84.025,26.65 86.975,26.65 93.125,32.8 93.125,58.25 96.9,62.025 98,62.025 v1(98,62.05)
NetR76_2: R76.2 U13.5 | length 1.9
  Top Layer w0.508: U13.5@45.3,8.775 46.025,8.775 46.325,9.075 46.925,9.075 R76.2@47.025,9.175
NetR77_2: R77.2 T16.1 U18.2 | length 20.5
  Top Layer w0.381: U18.2@62.325,20.175 61.275,20.175 60.975,20.475 60.975,22.975 63.475,25.475 71.65,25.475 72.625,26.45 T16.1@72.625,28.075 72.375,28.325 72.375,29.362 R77.2@72.112,29.625
NetR78_2: R78.2 T15.1 U33.4 | length 2.8
  Top Layer w0.254: T15.1@65.2,27.75 65.45,27.5 R78.2@66.7,27.5 67.625,27.5 U33.4@67.85,27.725
NetR380_1: R380.1 U21.1 | length 1.1
  Top Layer w0.508: 59.625,6.55 60.5,6.55 U21.1@60.675,6.375
NetR380_2: R380.2 T31.1 U20.3 | length 4.6
  Top Layer w0.762: U20.3@55.98,7.775 57.405,6.35 58.325,6.35 58.325,7.925 T31.1@58.4,8
NetR381_1: R381.1 U21.3 | length 1.3
  Top Layer w0.508: R381.1@59.425,4.975 60.575,4.975 U21.3@60.675,5.075
NetU11_2: U11.2
NetU11_3: U11.3
NetU17_5: U17.5 U19.1 | length 3.6
  Top Layer w0.254: U17.5@67.45,20.95 66.8,21.6 66.8,23.2 67.075,23.475 U19.1@67.775,23.475
NetU25_2: U25.2 U28.44 U29.9 | length 35.6
  Top Layer w0.254: U28.44@85.65,43.125 85.65,46.475 81.075,51.05 U25.2@81.075,52.225 81.075,55.2 82.425,56.55 97.325,56.55 98.6,55.275 U29.9@98.6,52.225
NetU25_3: U25.3 U28.43 U29.8 | length 33.5
  Top Layer w0.254: U28.43@86.15,43.125 86.15,46.7 81.725,51.125 U25.3@81.725,52.225 81.75,52.25 81.75,54.65 83.2,56.1 96.975,56.1 97.95,55.125 U29.8@97.95,52.225
NetU25_4: U25.4 U28.42 U29.7 | length 31
  Top Layer w0.254: U25.4@82.375,52.171 82.375,51.175 86.65,46.9 U28.42@86.65,43.125 ; U25.4@82.375,52.225 82.375,54.25 83.756,55.631 96.069,55.631 97.3,54.4 U29.7@97.3,52.225
NetU25_5: U25.5 U28.41 U29.6 | length 28.8
  Top Layer w0.254: U28.41@87.15,43.125 87.15,47 83.025,51.125 U25.5@83.025,52.225 83.025,53.875 84.4,55.25 95.075,55.25 96.65,53.675 U29.6@96.65,52.225
NetU25_6: U25.6 U28.40 U29.5 | length 26.7
  Top Layer w0.254: U28.40@87.65,43.125 87.65,47.2 83.675,51.175 U25.6@83.675,52.225 83.675,53.55 84.825,54.7 94.875,54.7 96,53.575 U29.5@96,52.225
NetU25_7: U25.7 U28.39 U29.4 | length 24.6
  Top Layer w0.254: U28.39@88.15,43.125 88.15,47.3 84.325,51.125 U25.7@84.325,52.225 84.325,53.175 85.35,54.2 94.575,54.2 95.35,53.425 U29.4@95.35,52.225
NetU25_8: U25.8 U28.38 U29.3 | length 22.7
  Top Layer w0.254: U28.38@88.65,43.125 88.65,47.5 84.975,51.175 U25.8@84.975,52.225 84.975,53.05 85.7,53.775 94.075,53.775 94.7,53.15 U29.3@94.7,52.225
NetU25_9: U25.9 U28.37 U29.2 | length 20.9
  Top Layer w0.254: U28.37@89.15,43.125 89.15,47.75 85.625,51.275 U25.9@85.625,52.225 85.625,53.025 85.975,53.375 93.775,53.375 94.05,53.1 U29.2@94.05,52.225
NetU25_12: U25.12 U26.24 | length 16.4
  Top Layer w0.254: U26.24@83.055,73.325 83.05,73.32 83.05,70.575 84.975,68.65 84.975,60.8 85.625,60.15 U25.12@85.625,57.975
NetU25_13: U25.13 U26.6 | length 4.3
  Top Layer w0.254: U26.6@84.325,62.025 84.35,62 84.35,60.775 84.975,60.15 U25.13@84.975,57.975
NetU25_14: U25.14 U26.25 | length 16.4
  Top Layer w0.254: U26.25@81.785,73.325 81.75,73.29 81.75,70.175 83.7,68.225 83.7,60.85 84.325,60.225 U25.14@84.325,57.975
NetU25_15: U25.15 U26.5 | length 4.3
  Top Layer w0.254: U26.5@83.055,62.025 83.055,60.795 83.675,60.175 U25.15@83.675,57.975
NetU25_16: U25.16 U26.26 | length 16.4
  Top Layer w0.254: U26.26@80.515,73.325 80.525,73.315 80.525,69.9 82.45,67.975 82.45,60.7 83.025,60.125 U25.16@83.025,57.975
NetU25_17: U25.17 U26.4 | length 4.3
  Top Layer w0.254: U26.4@81.785,62.025 81.85,61.96 81.85,60.525 82.375,60 U25.17@82.375,57.975
NetU25_18: U25.18 U26.27 | length 16.4
  Top Layer w0.254: U26.27@79.245,73.325 79.3,73.27 79.3,69.975 81.175,68.1 81.175,60.225 81.725,59.675 U25.18@81.725,57.975
NetU25_19: U25.19 U26.3 | length 4.3
  Top Layer w0.254: U26.3@80.515,62.025 80.515,59.985 81.075,59.425 U25.19@81.075,57.975
NetU27_3: U27.3 U29.15 | length 6.9
  Top Layer w0.254: U29.15@96.65,57.975 96.65,59.125 97.975,60.45 100.1,60.45 100.54,60.89 U27.3@100.54,62.025
NetU27_4: U27.4 U29.14 | length 7.6
  Top Layer w0.254: U29.14@97.3,57.975 97.3,59.1 98.15,59.95 101.025,59.95 101.81,60.735 U27.4@101.81,62.025
NetU27_5: U27.5 U29.13 | length 8.3
  Top Layer w0.254: U29.13@97.95,57.975 97.95,58.95 98.5,59.5 102.15,59.5 103.08,60.43 U27.5@103.08,62.025
NetU27_6: U27.6 U29.12 | length 9.1
  Top Layer w0.254: U29.12@98.6,57.975 98.6,58.769 98.906,59.075 103.5,59.075 104.35,59.925 U27.6@104.35,62.025
NetU27_24: U27.24 U29.16 | length 18.3
  Top Layer w0.254: U29.16@96,57.975 96,59.2 96.925,60.125 96.925,65.225 103.08,71.38 U27.24@103.08,73.325
NetU27_25: U27.25 U29.17 | length 18
  Top Layer w0.254: U29.17@95.35,57.975 95.35,59.3 96.45,60.4 96.45,66.075 101.81,71.435 U27.25@101.81,73.325
NetU27_26: U27.26 U29.18 | length 17.8
  Top Layer w0.254: U29.18@94.7,57.975 94.7,59.4 96,60.7 96,67.1 100.54,71.64 U27.26@100.54,73.325
NetU27_27: U27.27 U29.19 | length 17.5
  Top Layer w0.254: U29.19@94.05,57.975 94.05,59.575 95.525,61.05 95.525,67.95 99.27,71.695 U27.27@99.27,73.325
NetU28_17: U28.17 U30.2 U35.9 | length 38.1
  Top Layer w0.254: U28.17@85.65,34.925 85.65,31.6 81.075,27.025 U35.9@81.075,23.45 81.075,20.575 82.675,18.975 97.275,18.975 98.6,20.3 U30.2@98.6,23.45
NetU28_18: U28.18 U30.3 U35.8 | length 35.9
  Top Layer w0.254: U28.18@86.15,34.925 86.15,31.05 81.725,26.625 U35.8@81.725,23.45 81.725,21 83.25,19.475 96.725,19.475 98,20.75 98,23.4 U30.3@97.95,23.45
NetU28_19: U28.19 U30.4 U35.7 | length 33.6
  Top Layer w0.254: U28.19@86.65,34.925 86.65,30.7 82.375,26.425 U35.7@82.375,23.45 82.375,21.375 83.775,19.975 96.175,19.975 97.3,21.1 U30.4@97.3,23.45
NetU28_20: U28.20 U30.5 U35.6 | length 31.4
  Top Layer w0.254: U28.20@87.15,34.925 87.15,30.225 83.025,26.1 U35.6@83.025,23.45 83.025,21.625 84.1,20.55 95.675,20.55 96.675,21.55 96.675,23.425 U30.5@96.65,23.45
NetU28_21: U28.21 U30.6 U35.5 | length 29.2
  Top Layer w0.254: U28.21@87.65,34.925 87.65,29.85 83.675,25.875 U35.5@83.675,23.45 83.675,21.925 84.556,21.044 95.119,21.044 96,21.925 U30.6@96,23.45
NetU28_22: U28.22 U30.7 U35.4 | length 27.2
  Top Layer w0.254: U28.22@88.15,34.925 88.15,29.525 84.325,25.7 U35.4@84.325,23.45 84.325,22.1 85,21.425 94.4,21.425 95.35,22.375 U30.7@95.35,23.45
NetU28_23: U28.23 U30.8 U35.3 | length 25.1
  Top Layer w0.254: U28.23@88.65,34.925 88.65,29.225 84.975,25.55 U35.3@84.975,23.45 84.975,22.45 85.525,21.9 94.025,21.9 94.7,22.575 U30.8@94.7,23.45
NetU28_24: U28.24 U30.9 U35.2 | length 23.3
  Top Layer w0.254: U28.24@89.15,34.925 89.15,28.9 85.625,25.375 U35.2@85.625,23.45 85.625,22.575 85.875,22.325 93.725,22.325 94.05,22.65 U30.9@94.05,23.45
NetU30_12: U30.12 U31.3 | length 17.9
  Top Layer w0.254: U30.12@94.05,17.7 94.05,16.4 95.457,14.993 95.457,10.368 100.54,5.285 U31.3@100.54,2.5
NetU30_13: U30.13 U31.4 | length 18.1
  Top Layer w0.254: U30.13@94.7,17.7 94.7,16.522 95.838,15.384 95.838,10.526 101.81,4.554 U31.4@101.81,2.5
NetU30_14: U30.14 U31.5 | length 18.4
  Top Layer w0.254: U30.14@95.35,17.7 95.35,16.45 96.219,15.581 96.219,10.684 103.08,3.823 U31.5@103.08,2.5
NetU30_15: U30.15 U31.6 | length 18.7
  Top Layer w0.254: U30.15@96,17.7 96,16.339 96.6,15.739 96.6,10.841 104.35,3.091 U31.6@104.35,2.5
NetU30_16: U30.16 U31.27 | length 5
  Top Layer w0.254: U30.16@96.65,17.7 96.65,16.925 99.27,14.305 U31.27@99.27,13.8
NetU30_17: U30.17 U31.26 | length 5.9
  Top Layer w0.254: U30.17@97.3,17.7 97.3,16.875 99.025,15.15 100.2,15.15 100.54,14.81 U31.26@100.54,13.8
NetU30_18: U30.18 U31.25 | length 6.9
  Top Layer w0.254: U30.18@97.95,17.7 97.95,16.85 99.231,15.569 101.531,15.569 101.85,15.25 101.85,13.84 U31.25@101.81,13.8
NetU30_19: U30.19 U31.24 | length 7.4
  Top Layer w0.254: U30.19@98.6,17.7 98.6,16.9 99.55,15.95 102.35,15.95 103.08,15.22 U31.24@103.08,13.8
NetU32_3: U32.3 U35.13 | length 16.2
  Top Layer w0.254: U32.3@80.515,2.5 80.5,2.515 80.5,4 79.875,4.625 79.875,14.975 81.725,16.825 U35.13@81.725,17.7
NetU32_4: U32.4 U35.15 | length 16.2
  Top Layer w0.254: U32.4@81.785,2.5 81.725,2.56 81.725,3.7 81.15,4.275 81.15,14.85 83.025,16.725 U35.15@83.025,17.7
NetU32_5: U32.5 U35.17 | length 16.3
  Top Layer w0.254: U32.5@83.055,2.5 83.075,2.52 83.075,3.55 82.425,4.2 82.425,14.925 84.325,16.825 U35.17@84.325,17.7
NetU32_6: U32.6 U35.19 | length 16.3
  Top Layer w0.254: U32.6@84.325,2.5 84.325,4.175 83.675,4.825 83.675,14.925 85.625,16.875 U35.19@85.625,17.7
NetU32_24: U32.24 U35.18 | length 4.7
  Top Layer w0.254: U32.24@83.055,13.8 83.055,15.005 84.975,16.925 U35.18@84.975,17.7
NetU32_25: U32.25 U35.16 | length 4.7
  Top Layer w0.254: U32.25@81.785,13.8 81.785,14.824 83.675,16.714 U35.16@83.675,17.7
NetU32_26: U32.26 U35.14 | length 4.7
  Top Layer w0.254: U32.26@80.515,13.8 80.515,14.89 82.375,16.75 U35.14@82.375,17.7
NetU32_27: U32.27 U35.12 | length 4.7
  Top Layer w0.254: U32.27@79.245,13.8 79.245,15.07 81.075,16.9 U35.12@81.075,17.7
RE0: D4.1 R51.2 U2.8 | length 27.4
  Top Layer w0.508: R51.2@23.475,71.5 24.475,70.5 D4.1@25.35,70.5 27.575,70.5 29.125,72.05 34.525,72.05 38.325,68.25 38.325,64.025 v1(39.45,62.9)
  Bottom Layer w0.508: v1(39.45,62.9) 40.3,62.05 U2.8@40.3,59.195
RE1: D2.1 R33.2 U8.8 | length 28.9
  Top Layer w0.508: R33.2@23.925,29.05 24.6,28.375 D2.1@25.925,28.375 26.05,28.25 27.45,28.25 30.45,31.25 39.375,31.25 43.5,35.375 43.5,37.7 42.305,38.895 U8.8@40.3,38.895
TOR: T28.1 U19.4 U24.2 U24.5 | length 17.9
  Top Layer w0.254: U24.2@66.95,15.325 66.325,15.325 65.95,15.7 65.95,17.175 T28.1@66.05,17.275 67.325,18.55 67.925,18.55 68.575,19.2 68.575,20.975 U19.4@69.775,22.175 ; U24.5@69.75,14.325 v1(70.9,14.325)
  Bottom Layer w0.254: T28.1@66,17.225 T28.1@66.05,17.275 69.8,17.275 70.9,16.175 v1(70.9,14.325)
VIN: C19.1 C20.1 C50.1 C68.1 C118.1 C119.1 C121.1 C122.1 L1.1 L2.1 P3.49 P3.50 P5.1 SP1.1 SP1.3 SP2.1 SP2.3 U7.4 U7.5 U11.1 U39.4 U39.5 | length 247.1
  Top Layer w0.762: SP1.3@56.575,71.975 57.525,71.975 57.975,72.425 57.975,73.925 57.825,74.075 SP1.1@56.575,74.075 ; SP2.3@60.975,66.525 61.95,66.525 62.3,66.875 62.3,68.6 62.175,68.725 61.525,68.725
  Top Layer w1.27: 21.075,3.675 U39.4@21.075,4.375 21.075,6.625 L2.1@20.925,6.775 20.7,7 C119.1@18.25,7 18.25,5.375 C118.1@17.725,4.85 16.175,4.85 14.775,6.25 14.775,12.75 ; 21.075,11.2 21.075,14.5 L1.1@20.925,14.65 20.8,14.525 18.25,14.525 18.25,12.825 C68.1@17.725,12.3 17.275,12.75 14.775,12.75 ; 45.625,69.125 45.625,69.8 ; 49.125,68.875 55.725,68.875 ; SP1.1@56.575,74.35 C19.1@53.525,74.35 53.175,74.7 49.95,74.7 49.125,73.875 49.125,69.025 47.975,67.875 43,67.875 41.3,69.575 40.475,69.575 40.05,70 38.975,70 34.835,74.14 P5.1@34.835,74.5 10.3,74.5 2.075,66.275 2.075,17.35 6.675,12.75 14.775,12.75 ; C121.1@58.575,68.9 SP2.1@60.875,68.9
  Mid-Layer 1 w1.27: v1(55.825,69.175) 65.7,69.175 71.8,63.075 74.05,63.075 81.35,55.775 95.025,55.775 100.85,49.95 v1(116.475,49.95)
  other v1: 114.675,49.9 115.625,49.9 58.575,68.65
VNEG0: C63.1 C64.2 C385.2 R46.1 R47.2 T25.1 U5.2 | length 55.4
  Top Layer w0.508: T25.1@42.925,25.95 43.125,25.75 C63.1@45.2,25.75 ; R46.1@44.575,23.5 R47.2@43.5,23.5 43.425,23.575 C64.2@43.425,24.525 43.975,24.525 C63.1@45.2,25.75 ; v1(55.875,36.375) 55.85,36.375 53.825,34.35 51.075,34.35 45.2,28.475 C63.1@45.2,25.75 ; v1(55.95,43.175) v1(55.95,57.675) ; C385.2@61.575,64.75 61.655,64.67 U5.2@61.655,62.675
  Bottom Layer w0.508: v1@55.9,36.375 55.9,43.125 v1(55.95,43.175) ; v1(55.95,57.675) 61.7,63.425 v1(61.7,63.8)
VNEG1: C59.1 C61.2 C383.2 R39.1 R43.2 T21.1 U15.2 | length 25.1
  Top Layer w0.508: R39.1@51.475,23.5 R43.2@50.45,23.5 C61.2@50.45,24.525 50.45,25.35 T21.1@49.875,25.925 52.025,25.925 C59.1@52.2,25.75 52.2,30.05 57.975,35.825 57.975,39.375 57.57,39.78 U15.2@56.65,39.78 56.63,39.8 C383.2@55.2,39.8
VOUTA: R46.2 T22.1 U6.6 | length 12.4
  Top Layer w0.254: R46.2@45.675,23.5 48.1,23.5 49.675,21.925 49.675,20.75 51.05,19.375 U6.6@51.95,19.375 54.05,17.275 T22.1@54.775,17.275
VOUTB: R39.2 T23.1 U6.7 | length 9.4
  Top Layer w0.254: R39.2@52.575,23.5 52.55,23.475 52.55,22.875 52,22.325 50.875,22.325 50.45,21.9 50.45,20.525 51.1,19.875 U6.7@51.95,19.875 54.017,19.875 T23.1@54.775,19.117
VOUTC: R31.1 T14.1 T24.1 U6.8 | length 25.8
  Top Layer w0.254: U6.8@51.95,20.375 54.192,20.375 T24.1@54.775,20.958
  Top Layer w0.508: T24.1@54.775,20.958 T24.1@55.175,20.958 ; T24.1@55.175,21.225 57.225,21.225 61.775,25.775 61.775,28.95 65.475,32.65 R31.1@65.475,38.125
VOUTD: R11.1 T7.1 T250.1 U6.9 | length 37.9
  Top Layer w0.254: U6.9@51.95,20.875 52.85,20.875 T250.1@54.775,22.8 ; T7.1@59.275,50.975 59.35,51.05 R11.1@61,51.05
  Top Layer w0.508: T250.1@55.175,23.1 56.375,23.1 58.9,25.625 58.9,41.075 57.125,42.85 57.125,50.075 58.025,50.975 T7.1@59.275,50.975
VPOS: C55.1 C60.2 C382.2 C384.2 R44.1 R45.2 T20.1 U5.1 U15.1 | length 69.4
  Top Layer w0.508: C55.1@32.75,25.725 T20.1@34.975,25.725 39.375,25.725 41.875,28.225 41.9,28.225 50.425,36.75 v1(54.6,36.75) ; C60.2@34.1,22.975 R44.1@35.175,22.975 T20.1@35.175,25.525 ; U15.1@56.65,41.05 56.6,41 55,41 54.575,41.425 54.575,58.675 57.025,61.125 62.35,61.125 62.925,61.7 U5.1@62.925,62.675 64.025,62.675 C384.2@64.325,62.975
  Bottom Layer w0.508: v1(54.575,44) 54.575,41.425 55.15,40.85 55.15,37.3 v1(54.6,36.75)
pads on no net: P3.7 P3.8 P3.17 P3.27 P3.36 P3.37 P3.41 SP1.4 SP2.4 U7.6 U11.4 U17.3 U22.1 U26.2 U26.13 U26.20 U26.21 U27.2 U27.13 U27.20 U27.21 U28.25 U28.26 U28.35 U28.36 U31.2 U31.13 U31.20 U31.21 U32.2 U32.13 U32.20 U32.21 U39.6

## Polygon pours and split planes (outlines as drawn)
DGND on Bottom Layer "Keep-Out Layer-No Net" (solid, remove dead copper, pour order 2): -5.825,83.325 148.475,83.325 152.35,79.45 146.2,73.3 146.2,-15.775 0.575,-15.775 -0.625,-14.575
DGND on GND (split plane): 139.49,-4.49 -4.49,-4.49 -4.49,79.49 139.49,79.49

## Keep-outs
Keep-Out Layer:
  lines w0.254: 0,3 ccw(c3,3) 3,0 131,0 ccw(c131,3) 134,3 134,73 ccw(c131,73) 131,76 3,76 ccw(c3,73) 0,73 0,3 ; 9.75,6 ccw(c10.525,6) 11.3,6 11.3,9.5 ccw(c10.525,9.5) 9.75,9.5 9.75,6 ; 9.75,19 ccw(c10.525,19) 11.3,19 11.3,22.5 ccw(c10.525,22.5) 9.75,22.5 9.75,19 ; 122.7,6 ccw(c123.475,6) 124.25,6 124.25,11 ccw(c123.475,11) 122.7,11 122.7,6 ; 122.7,24 ccw(c123.475,24) 124.25,24 124.25,31.5 ccw(c123.475,31.5) 122.7,31.5 122.7,24 ; 122.7,44.5 ccw(c123.475,44.5) 124.25,44.5 124.25,52 ccw(c123.475,52) 122.7,52 122.7,44.5 ; 122.7,65 ccw(c123.475,65) 124.25,65 124.25,70 ccw(c123.475,70) 122.7,70 122.7,65

## Other copper
Top Layer:
  rectangle net +5: 65.1,47.3 66.925,49.625
  rectangle net +5: 69.5,34.525 71.3,36.75
  rectangle net -5: 65.025,53.6 66.95,55.975
  rectangle net -5: 69.475,40.725 71.325,42.85
  region net +5: 27.475,11.25 28.175,10.55 28.175,9.575 28.15,9.55 28.875,8.825 31.5,8.825 31.5,10.975 30.325,11.125 27.475,11.75
  region net +5: 31.95,21.675 32.7,21.45 33.525,21.15 33.95,21.15 33.95,20.65 33.875,20.05 33.8,19.475 33.275,19.475 32.375,19.925 31.925,20.2
  region net +5: 46.85,46.575 46.9,46.525 49.35,46.525 49.4,43.825 49.35,43.225 49.375,43.2 49.325,43.15 48.475,43.175 47,44.35 46.9,45.3
  region net +5: 47.125,65.525 48.075,65.525 49.275,65.45 49.35,64.45 49.425,63.525 49.325,63.325 49.25,63.25 48.35,63.25 48.35,63.275 47.125,64.5
  region net +5: 60.4,43.225 60.85,43.2 61.9,43.375 62.925,43 62.925,42.475 62.45,41.35 62.45,40.85 62.35,40.75 60.9,40.75 60.65,41.55 60.4,42.375
  region net +5: 62.625,58.425 63.925,59.725 66.2,59.725 66.3,59.625 66.25,59.175 66.3,58.85 65.75,58.275 65.2,57.875 63.6,56.775 63.575,56.8 62.575,56.8
  region net +5: 70.4,58.725 70.875,58.725 71.85,59.7 72.3,59.7 72.3,60.675 72.275,60.7 70.25,60.7 70.1,59.7
  region net +5: 71.45,29.875 71.375,29.8 68.7,29.8 68.8,28.05 69.2,27.975 69.525,27.825 69.55,27.15 71.45,27.175 71.6,27.725 71.325,27.875 70.475,27.95 70.475,28.8 70.6,29.125 70.925,29.25 71.55,29.25
  region net -5: 40.15,13.25 40.425,13.525 40.5,14.35 40.8,15.075 41.85,15.2 42.125,13.775 43.475,13.725 43.5,13.7 43.45,11.425 42.925,10.35 42.9,9.5 42.05,9.5 42.05,10.175 41.025,12.175 40.1,12.75
  region net -5: 42.15,43.65 42.175,43.625 43.075,44.1 43.575,43.825 44.35,43.825 45,43.275 45.475,42.925 46.55,42.8 46.55,42.275 46.625,42.2 43.2,42.2 42.8,42.6 42.125,43.125
  region net -5: 42.15,63.8 42.25,63.9 44.425,63.9 45.45,62.875 46.575,62.875 46.575,62.25 46.525,62.2 44.625,62.425 43.85,62.95 42,62.95
  region net -5: 60.9,38.2 62.65,38.1 62.925,37.75 63.35,37.425 63.325,37 63.325,36.925 62.6,36.2 62.025,36.2 62.025,35.55 62.2,35.525 62.5,35.575 63.175,35.85 63.675,36.275 64.375,36.7 64.375,37.35 64.125,38.425 62.375,38.8 60.875,38.8
  region net D5V: 69.975,18.45 69.5,18.45 69.5,18.025 69.1,17.625 69.1,15.85 69.275,15.675 69.3,15.7 70.25,15.7 70.25,18.175
  region net VIN: 119.55,50.4 116,50.4 114.25,50.3 114.225,49.725 114.225,49.35 115.825,49.375 116.675,49.375 116.95,49.475 117.4,49.525 118,49.6 118,49.625 119.45,49.625
  region net DGND: 31.3,18.95 37.675,18.95 38.275,18.35 38.275,17.475 35.775,17.1 34.4,16.675 34.025,17.05 31.6,17.05
  region net DGND: 42.75,71.425 41.675,71.425 41.25,71 41.35,70.95 41.5,70.55 42.35,69.9 42.3,69.9 42.775,69.825 42.8,70.025 42.775,70.225
Mid-Layer 1:
  rectangle net -5: 50.35,54.55 67.1,56.275
  rectangle net -5: 50.35,52.25 52.35,56.275
  region net +5: 69.6,36.5 71.225,36.5 71.325,36.4 71.325,34.325 68.525,31.525 66.675,31.525 67.375,32.825 69.275,34.35 69.525,35.9
Bottom Layer:
  rectangle net -5: 41.35,51.65 52.5,54.325
  pour cut-out: 32.975,75.975 33.125,75.825 33.125,72.625 38.375,72.625 39.125,73.375 39.125,76.05
  pour cut-out: 63.137,53.4 61.912,53.4 60.862,52.35 60.587,52.25 60.537,50.575 62.312,49.8 63.588,49.85 64.263,50.65 64.337,52.475 63.887,53.075
  pour cut-out: 67.612,40.45 66.387,40.45 65.337,39.4 65.062,39.3 65.012,37.625 66.787,36.85 68.063,36.9 68.738,37.7 68.812,39.525 68.362,40.125
GND (plane layer: these items are gaps in the copper):
  pour cut-out: 63.225,53.4 62,53.4 60.95,52.35 60.675,52.25 60.625,50.575 62.4,49.8 63.675,49.85 64.35,50.65 64.425,52.475 63.975,53.075
  pour cut-out: 67.6,40.45 66.375,40.45 65.325,39.4 65.05,39.3 65,37.625 66.775,36.85 68.05,36.9 68.725,37.7 68.8,39.525 68.35,40.125

## Silkscreen, mask and mechanical layers (free items; w line width, h text height)
Top Overlay:
  lines w0.2: 75.6,0 75.6,29.175
  text "V1" at 49.25,27.025 h1.02
  text "0.625V" at 34.6,26.9 h1.02
  text "V0" at 41.825,26.875 h1.02
  text "2V5" at 37.725,23.75 h1.02
  text "OD" at 56.475,23 h1.02
  text "OC" at 56.525,20.85 h1.02
  text "OB" at 56.525,18.65 h1.02
  text "OA" at 56.6,16.675 h1.02
  text "-5V" at 37.475,14.475 h1.02
  text "ADCCLK" at 71.45,7.9 h1.02 r270
  text "A5V" at 33.75,7.35 h1.02
  text "D5V" at 36.6,1.975 h1.02